# Altium PCB ComModule.pcbdoc
Units mm, origin at the board's own origin, x right, y up, seen from the top; angles counter-clockwise.
Board outline 25.4 x 31.2 mm, 2 copper layers (Top Layer, Bottom Layer); 26 components, 20 nets, 141 pads, 54 vias.
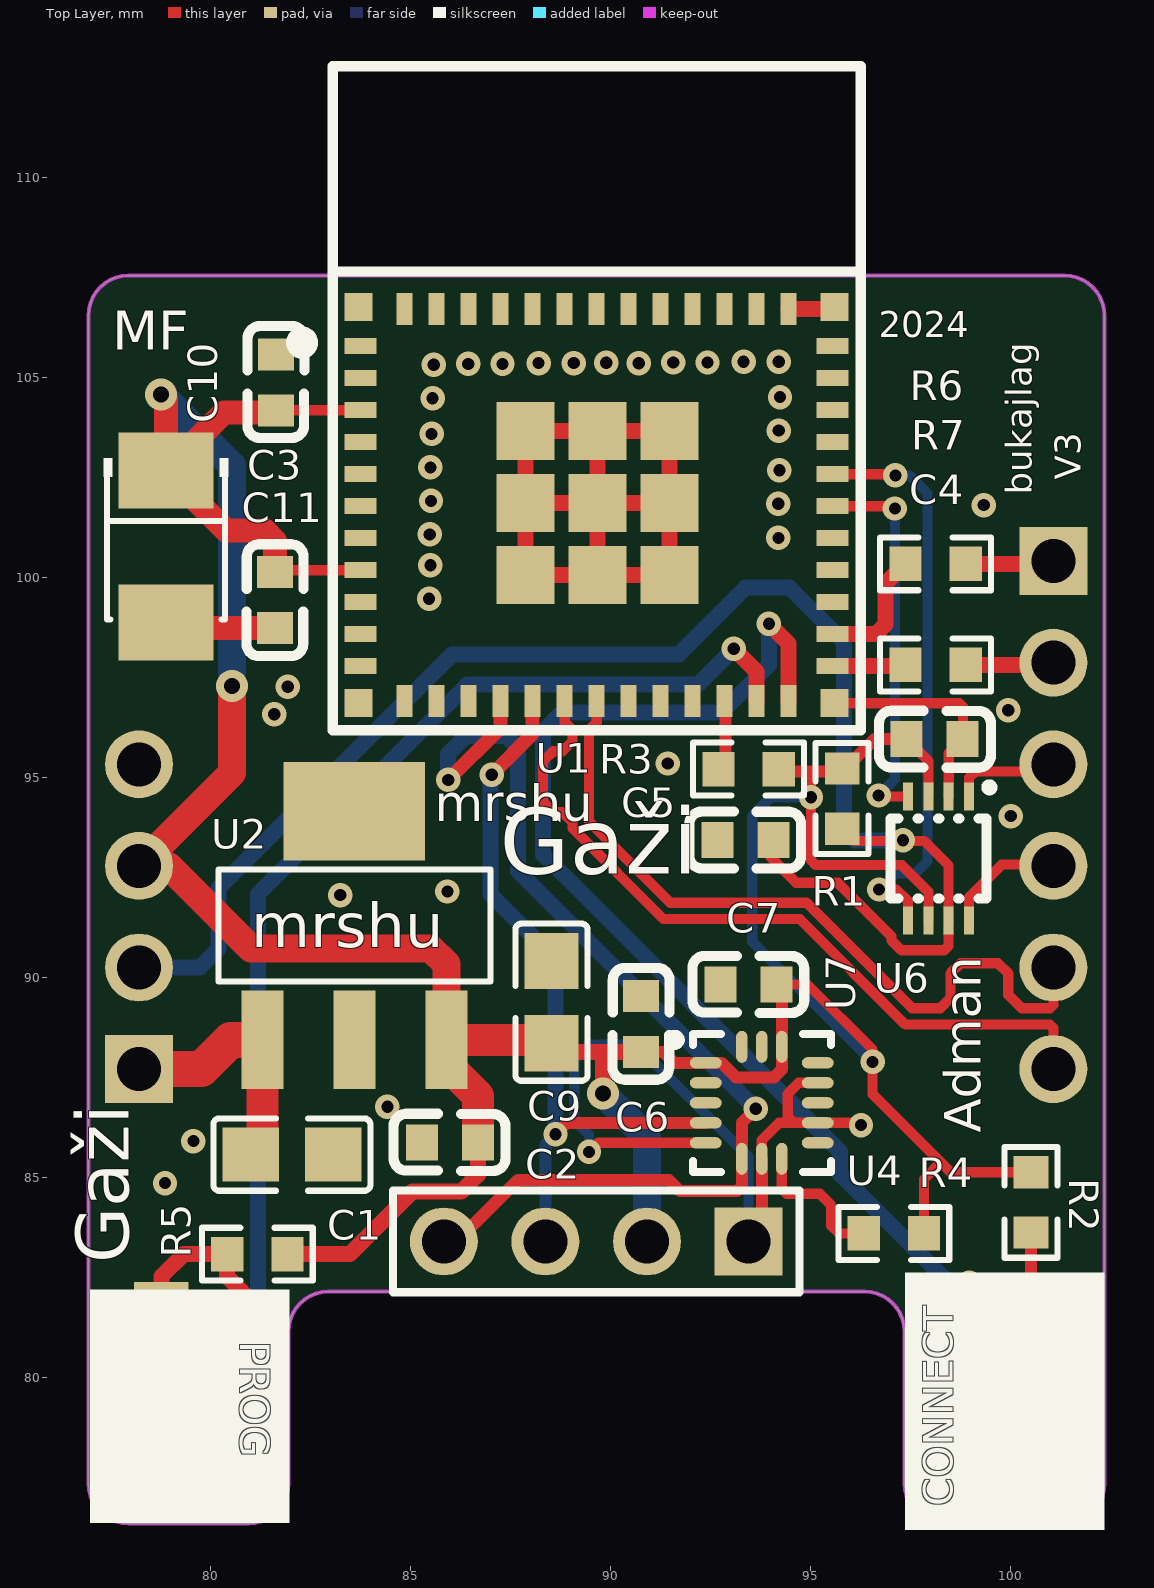
[diagram p0: Top Layer view]
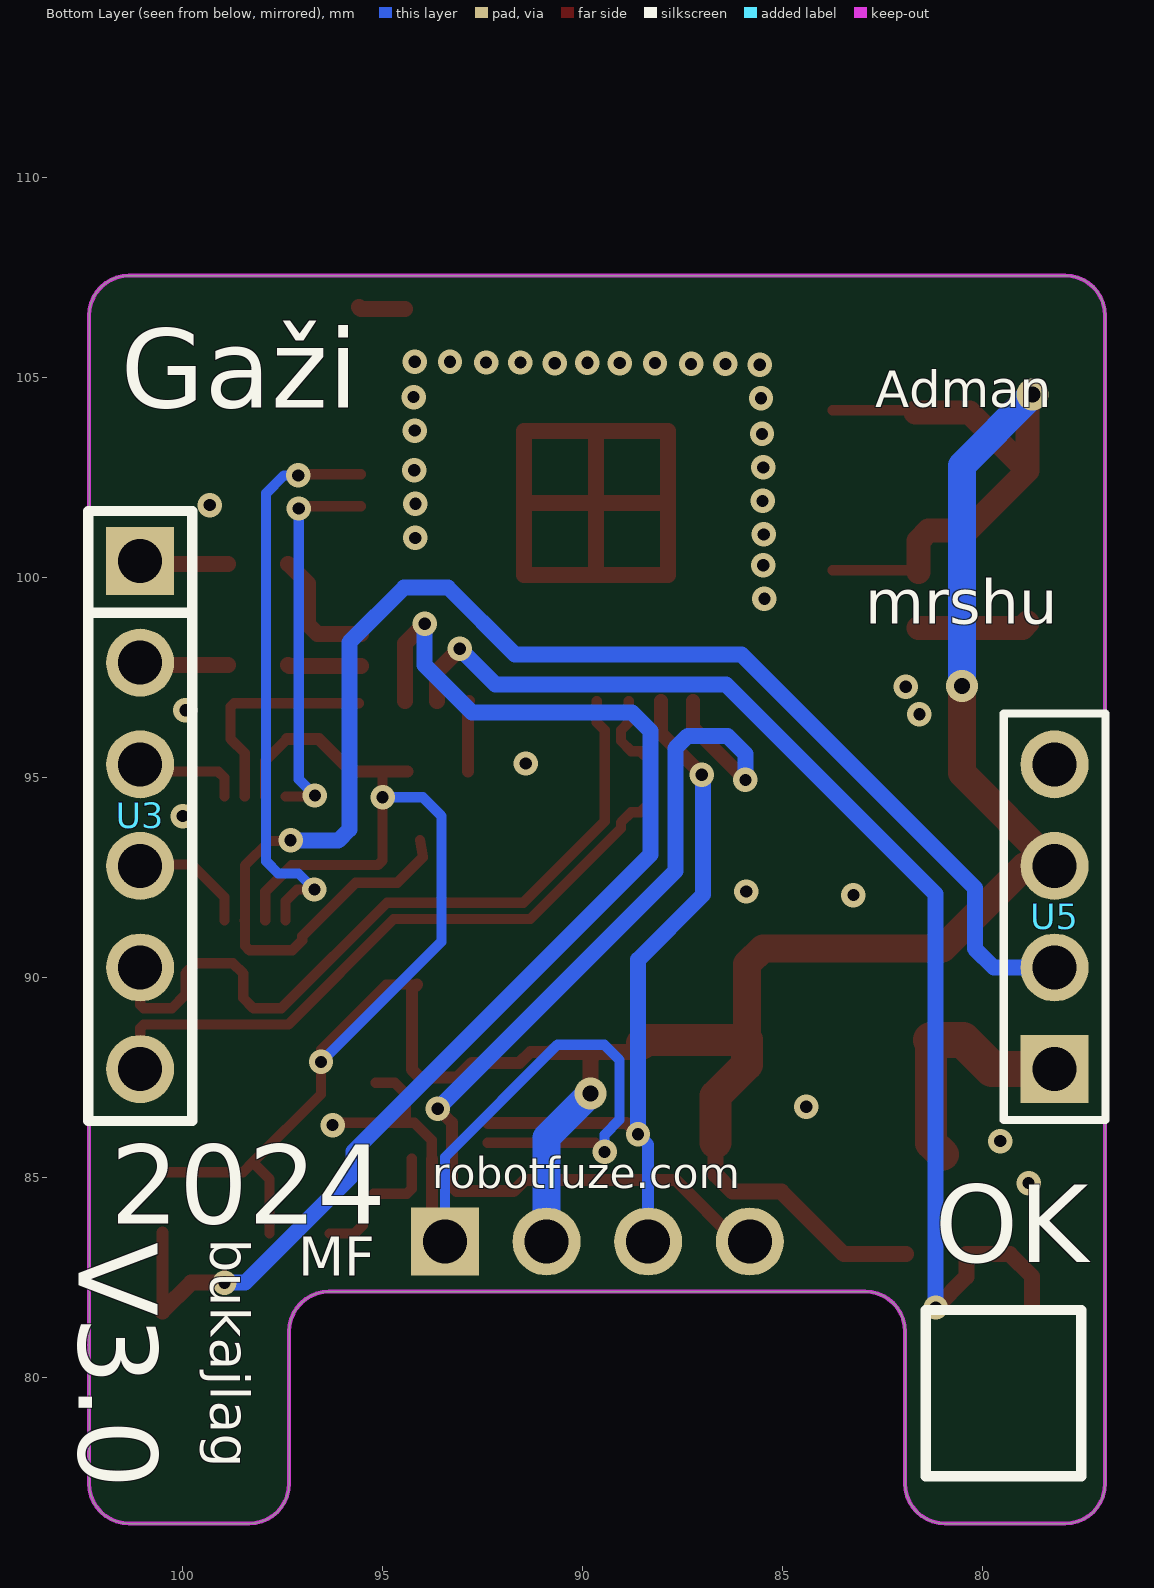
[diagram p1: Bottom Layer view, seen from below]

## Layer stack, top to bottom
Top Solder Mask Layer: solder mask 0.0102, Solder Resist, Dk 3.5
Top Layer: signal copper 0.0356
Dielectric1: dielectric 0.32, FR-4, Dk 4.8
Bottom Layer: signal copper 0.0356
Bottom Solder Mask Layer: solder mask 0.0102, Solder Resist, Dk 3.5

## Board outline
77.937,76.36 80.937,76.36 ccw(c80.937,77.36) 81.937,77.36 81.937,81.16 cw(c82.937,81.16) 82.937,82.16 96.337,82.16 cw(c96.337,81.16) 97.337,81.16 97.337,77.36 ccw(c98.337,77.36) 98.337,76.36 101.337,76.36 ccw(c101.337,77.36) 102.337,77.36 102.337,106.56 ccw(c101.337,106.56) 101.337,107.56 77.937,107.56 ccw(c77.937,106.56) 76.937,106.56 76.937,77.36 ccw(c77.937,77.36)

## Design rules (kind name [scope] priority, off if disabled: settings)
Clearance [All] p1: gap=0.254 ignorepadtopadclearanceinfootprint=FALSE except(0: Arc-Hole Track-Hole SMDPad-Hole THPad-Hole Via-Hole Fill-Hole Poly-Hole Region-Hole Text-Hole)
PolygonConnect [All] p1: connectstyle=Relief reliefconductorwidth=0.254 reliefentries=4 polygonreliefangle="90 Angle" airgapwidth=0.254
RoutingVias [All] p1: holewidth=0.711 width=1.27 viastyle="Through Hole" minholewidth=0.711 minwidth=1.27 maxholewidth=0.711 maxwidth=1.27
SolderMaskExpansion [All] p1: expansion=0.102 istentingtop=FALSE
Width [All] p1: maxlimit=0.254 minlimit=0.254 preferedwidth=0.254
30 further rules are at their usual default settings.

## Components (designator, comment, footprint, x,y, rotation, side; value= is the part's Value field where it differs from the comment)
C1 "0805B334K500NT" C0805 82.023,85.583 r180 top
C2 "0603B104K500NT_C30926" C0603 85.972,85.888 r0 top
C3 "0603B104K500NT_C30926" C0603 81.62,104.892 r270 top
C4 "0603B104K500NT_C30926" C0603 98.091,95.971 r180 top
C5 "0603B104K500NT_C30926" C0603 93.364,93.444 r0 top
C6 "0603B104K500NT_C30926" C0603 90.748,88.847 r270 top
C7 "0603B104K500NT_C30926" C0603 93.44,89.837 r0 top
C9 "0805B334K500NT" C0805 88.512,89.393 r270 top
C10 "CA45-B-6.3V-100uF-K" CAP-SMD_L3.5-W2.8-R-RD 78.873,100.785 r90 top
C11 "0603B104K500NT_C30926" C0603 81.604,99.451 r90 top
CONNECT "TS-1088-AR02016" SW-SMD_L3.9-W3.0-P4.45 100.503,79.48 r90 top
PROG "TS-1088-AR02016" SW-SMD_L3.9-W3.0-P4.45 78.76,79.594 r90 top
R1 "0603WAF1002T5E" R0603 95.777,94.486 r90 top
R2 "0603WAF1002T5E" R0603 100.501,84.389 r90 top
R3 "0603WAF1002T5E" R0603 93.44,95.222 r0 top
R4 "0603WAF1002T5E" R0603 97.072,83.614 r0 top
R5 "0603WAF1002T5E" R0603 81.159,83.094 r0 top
R6 "0603WAJ0102T5E" R0603 98.114,100.353 r180 top
R7 "0603WAJ0102T5E" R0603 98.114,97.826 r180 top
U1 "ESP32-C6-MINI-1-N4" WIFIM-SMD_61P-L16.6-W13.2-P0.80-ESP32-C6-MINI-1-N4 89.644,101.819 r0 top
U2 "UA78M33CDCYR" SOT-223_L6.5-W3.5-P2.30-LS7.0-BR 83.585,91.311 r270 top
U3 "2541WV-06P" HDR-TH_6P-P2.54-V-M 101.06,94.072 r270 bottom
U4 "2541WV-04P" HDR-TH_4P-P2.54-V-M-1 89.63,83.412 r180 top
U5 "2541WV-04P" HDR-TH_4P-P2.54-V-M-1 78.2,91.532 r90 bottom
U6 "TXS0102DCUR" VSON8_L2.0-W2.3-P0.50-LS3.1-BL 98.19,92.987 r180 top
U7 "LIS3DHTR" LGA-16_L3.0-W3.0-P0.50-TL 93.77,86.878 r0 top

## Footprints (in the part's own frame and the unit in brackets; to place one, negate y for a bottom-side part, rotate by r counter-clockwise, add the part's x,y. Pads: shape width x height; smd on the part's side, far side on the other; paste and mask are expansions set on the pad)
C0603 [mm]
  rect 0.8x0.9 smd paste+0 mask+0.051: 1(-0.7,0) 2(0.7,0)
  silkscreen extent -1.41,-0.71 1.39,0.72
C0805 [mm]
  rect 1.41x1.35 smd paste-100 mask+0.051: 1(-1.03,0) 2(1.03,0)
  silkscreen extent -1.96,-0.9 1.96,0.9
CAP-SMD_L3.5-W2.8-R-RD [mm]
  rect 1.9x2.376 smd paste+0 mask+0.051: 1(1.899,0) 2(-1.899,0)
  silkscreen extent -1.83,-1.55 2.21,1.55
HDR-TH_4P-P2.54-V-M-1 [mm]
  rect 1.7x1.7 hole 1.1 paste+0 mask+0.051: 1(-3.81,0)
  round 1.7 hole 1.1 paste+0 mask+0.051: 2(-1.27,0) 3(1.27,0) 4(3.81,0)
  silkscreen extent -5.08,-1.27 5.08,1.27
HDR-TH_6P-P2.54-V-M [mm]
  rect 1.7x1.7 hole 1.1 paste+0 mask+0.051: 1(-6.35,0)
  round 1.7 hole 1.1 paste+0 mask+0.051: 2(-3.81,0) 3(-1.27,0) 4(1.27,0) 5(3.81,0) 6(6.35,0)
  silkscreen extent -7.6,-1.3 7.65,1.3
LGA-16_L3.0-W3.0-P0.50-TL [mm]
  oval 0.8x0.28 smd paste+0 mask+0.051: 1(-1.4,1) 2(-1.4,0.5) 3(-1.4,0) 4(-1.4,-0.5) 5(-1.4,-1) 9(1.4,-1) 10(1.4,-0.5) 11(1.4,0) 12(1.4,0.5) 13(1.4,1)
  oval 0.28x0.8 smd paste+0 mask+0.051: 6(-0.5,-1.4) 7(0,-1.4) 8(0.5,-1.4) 14(0.5,1.4) 15(0,1.4) 16(-0.5,1.4)
  silkscreen extent -2.3,-1.72 1.73,1.73
R0603 [mm]
  rect 0.806x0.864 smd paste-100 mask+0.051: 1(-0.753,0) 2(0.753,0)
  silkscreen extent -1.39,-0.66 1.39,0.66
SOT-223_L6.5-W3.5-P2.30-LS7.0-BR [mm]
  rect 2.465x1.05 smd paste+0 mask+0.051: 1(2.858,-2.3) 2(2.857,0) 3(2.857,2.3)
  rect 2.465x3.54 smd paste+0 mask+0.051: 4(-2.857,0)
  silkscreen extent -1.4,-3.4 1.4,3.4
SW-SMD_L3.9-W3.0-P4.45 [mm]
  rect 1.23x1.36 smd: 1(-2.185,0) 2(2.185,0)
  silkscreen extent -2.03,-1.62 2.25,1.62
VSON8_L2.0-W2.3-P0.50-LS3.1-BL [mm]
  rect 0.25x0.7 smd paste+0 mask+0.051: 1(-0.762,-1.55) 2(-0.254,-1.55) 3(0.254,-1.55) 4(0.762,-1.55) 5(0.762,1.55) 6(0.254,1.55) 7(-0.254,1.55) 8(-0.762,1.55)
  silkscreen extent -1.37,-1.88 1.2,1
WIFIM-SMD_61P-L16.6-W13.2-P0.80-ESP32-C6-MINI-1-N4 [mm]
  rect 0.8x0.4 smd paste+0 mask+0.05: 1(-5.9,3.975) 2(-5.9,3.175) 3(-5.9,2.375) 4(-5.9,1.575) 5(-5.9,0.775) 6(-5.9,-0.025) 7(-5.9,-0.825) 8(-5.9,-1.625) 9(-5.9,-2.425) 10(-5.9,-3.225) 11(-5.9,-4.025) 25(5.9,-4.025) 26(5.9,-3.225) 27(5.9,-2.425) 28(5.9,-1.625) 29(5.9,-0.825) 30(5.9,-0.025) 31(5.9,0.775) 32(5.9,1.575) 33(5.9,2.375) 34(5.9,3.175) 35(5.9,3.975)
  rect 0.4x0.8 smd paste+0 mask+0.05: 12(-4.8,-4.9) 13(-4,-4.9) 14(-3.2,-4.9) 15(-2.4,-4.9) 16(-1.6,-4.9) 17(-0.8,-4.9) 18(0,-4.9) 19(0.8,-4.9) 20(1.6,-4.9) 21(2.4,-4.9) 22(3.2,-4.9) 23(4,-4.9) 24(4.8,-4.9) 36(4.8,4.9) 37(4,4.9) 38(3.2,4.9) 39(2.4,4.9) 40(1.6,4.9) 41(0.8,4.9) 42(0,4.9) 43(-0.8,4.9) 44(-1.6,4.9) 45(-2.4,4.9) 46(-3.2,4.9) 47(-4,4.9) 48(-4.8,4.9)
  rect 1.45x1.45 smd paste+0 mask+0.05: 49(-1.775,-1.75) 49(-1.775,0.05) 49(-1.775,1.85) 49(0.025,-1.75) 49(0.025,0.05) 49(0.025,1.85) 49(1.825,-1.75) 49(1.825,0.05) 49(1.825,1.85)
  rect 0.7x0.7 smd paste+0 mask+0.05: 50(5.95,4.95) 51(5.95,-4.95) 52(-5.95,-4.95) 53(-5.95,4.95)
  silkscreen extent -7.57,-5.62 6.6,10.98

## Via types
v1: diameter 0.61, hole 0.305, Top Layer to Bottom Layer, 51 vias
v2: diameter 0.8, hole 0.4, Top Layer to Bottom Layer, 3 vias

## Nets (pads, with @x,y where several pads share a name; then routed paths per layer and width w, separated by ;. In a path a pad name is that pad's centre, name@x,y a point inside that pad or via, vN(x,y) a via of type N, cw(c..) or ccw(c..) an arc to the next point about the centre after c; other vN are vias at no path point)
3.3V: C2.2 C3.2 C4.2 C6.2 C7.2 C9.2 C10.1 C11.2 R1.2 R2.2 R3.2 R4.2 R5.2 U1.3 U1.8 U2.3 U4.2 U5.3 U6.3 U6.6 U7.1 U7.14 | length 94.7
  Top Layer w0.254: C11.2 81.646,100.194 U1.8 ; C3.2@81.68,104.139 81.735,104.194 U1.3
  Top Layer w0.256: C7.2 94.913,89.837 96.54,88.211 v1(96.54,87.902) 96.54,87.093 98.244,85.389 ; 95.034,95.159 95,95.125 v1(95,94.515) 95,92.942 95.12,92.822 97.27,92.822 97.936,92.156 U6.6 ; C4.2 97.936,95.427 U6.3 ; R4.2 97.826,84.97 98.244,85.389 ; R2.2 98.491,85.142 98.244,85.389
  Top Layer w0.3: C6.2 91.308,88.147 91.576,87.878 U7.1 92.763,87.878 93.13,87.512 94.07,87.512 94.27,87.712 U7.14 94.27,89.707 C7.2 ; R3.2@94.371,95.159 95.034,95.159 95.777,95.159 96.59,95.971 C4.2
  Top Layer w0.4: R5.2 83.471,83.094 85.033,84.656 86.252,84.656 86.672,85.076 C2.2 ; C9.2 88.729,88.147 89.67,88.147 ; v2(89.8,87.112) 89.8,88.017 89.67,88.147 ; C6.2 89.67,88.147
  Top Layer w0.6: v2(78.75,104.582) 78.873,104.459 C10.1 ; C11.2 81.604,100.928 81.35,101.182 80.375,101.182 C10.1 ; C3.2@81.68,104.139 80.329,104.139 C10.1
  Top Layer w0.7: v2(80.52,97.302) 80.52,95.122 U5.3 78.94,92.802 81,90.742 85.49,90.742 85.885,90.347 U2.3
  Top Layer w0.8: C2.2 86.672,87.055 85.885,87.842 U2.3 88.422,88.453 C9.2
  Bottom Layer w0.256: v1(95,94.515) 93.994,94.515 93.53,94.052 93.53,90.902 v1@96.53,87.902
  Bottom Layer w0.7: v2(78.75,104.582) 80.52,102.812 v2(80.52,97.302) ; v2(89.8,87.112) 90.9,86.012 U4.2
$1N2460: R3.1 U1.22 | length 1.8
  Top Layer w0.3: U1.22 92.864,96.899 R3.1@92.864,95.159
$1N2771: R4.1 U7.8 | length 3.6
  Top Layer w0.256: U7.8 94.27,84.727 94.393,84.605 95.218,84.605 95.497,84.326 95.497,83.818 95.701,83.614 R4.1
$1N3900: R7.2 U1.25 | length 1.8
  Top Layer w0.4: U1.25 97.329,97.794 R7.2
$1N4216: R6.2 U1.26 | length 3.1
  Top Layer w0.4: U1.26 96.621,98.594 96.869,98.842 96.869,99.862 R6.2
BUT_1: CONNECT.2 R2.1 U1.24 | length 31.8
  Top Layer w0.3: CONNECT.2 R2.1@100.503,83.634
  Top Layer w0.4: v1(93.948,98.854) 94.444,98.358 U1.24 ; v1(98.952,82.382) 99.785,82.382 CONNECT.2
  Bottom Layer w0.4: v1(93.948,98.854) 93.948,97.82 92.77,96.642 88.77,96.642 88.3,96.172 88.3,93.087 95.73,85.657 95.73,85.092 98.439,82.382 v1(98.952,82.382)
BUT_2: PROG.2 R5.1 U1.23 | length 30.6
  Top Layer w0.4: PROG.2 78.76,82.536 79.318,83.094 R5.1 80.406,82.526 v1(81.172,81.76) ; v1(93.072,98.232) 93.644,97.66 U1.23
  Bottom Layer w0.4: v1(81.172,81.76) 81.172,92.093 86.41,97.332 92.171,97.332 v1(93.072,98.232)
GND: C1.1 C2.1 C3.1 C4.1 C5.1 C6.1 C7.1 C9.1 C10.2 C11.1 CONNECT.1 PROG.1 U1.1 U1.2 U1.11 U1.14 U1.36 U1.37 U1.38 U1.39 U1.40 U1.41 U1.42 U1.43 U1.44 U1.45 U1.46 U1.47 U1.48 U1.49 U1.50 U1.51 U1.52 U1.53 U2.2 U2.4 U4.1 U5.4 U6.2 U7.5 U7.7 U7.10 U7.12 | length 51.5
  Top Layer w0.256: v1(89.45,85.652) 89.677,85.878 U7.5 ; U7.7 93.77,85.942 94.207,86.378 94.573,86.378 ; U7.12 94.697,87.378 94.42,87.102 94.42,86.532 94.573,86.378 ; U1.51 98.712,96.869 98.8,96.782 98.8,95.98 C4.1 98.444,95.624 U6.2 ; v1(96.25,86.322) 96.193,86.378 U7.10 94.573,86.378
  Top Layer w0.3: U4.1 93.77,83.742 U7.7
  Top Layer w0.4: U1.36 95.544,106.719 U1.50 ; U1.49@87.869,101.869 U1.49@89.669,101.869 ; U1.49@87.869,101.869 87.869,100.069 U1.49@89.669,100.069 ; U1.49@87.869,101.869 87.869,103.669 U1.49@89.669,103.669 ; U1.49@89.669,100.069 U1.49@89.669,101.869 ; U1.49@89.669,100.069 91.469,100.069 U1.49@91.469,101.869 ; U1.49@89.669,101.869 U1.49@91.469,101.869 ; U1.49@89.669,101.869 U1.49@89.669,103.669 ; U1.49@89.669,103.669 91.469,103.669 U1.49@91.469,101.869
  Top Layer w0.6: C10.2 79.008,98.751 C11.1
  Bottom Layer w0.256: v1(89.45,85.652) 89.45,86.085 89.08,86.455 89.08,87.952 89.46,88.332 90.63,88.332 93.44,85.522 U4.1
  other v1: 78.85,84.872 79.56,85.922 84.41,86.782 83.23,92.072 85.91,92.162 99.995,94.047 91.42,95.362 81.58,96.592 99.93,96.692 81.92,97.282 85.454,99.482 85.485,100.32 94.185,101 85.469,101.088 99.32,101.822 94.179,101.856 85.5,101.925 94.21,102.693 85.485,102.763 85.515,103.6 94.195,103.683 85.539,104.494 94.225,104.52 85.57,105.332 86.43,105.352 87.287,105.352 88.19,105.372 89.07,105.372 90.695,105.367 89.88,105.382 91.555,105.387 92.412,105.387 93.315,105.407 94.195,105.407
LOGV: C5.2 R1.1 U5.2 U6.7 | length 40.3
  Top Layer w0.25: R1.1 96.087,93.422 97.83,93.422 98.444,92.808 U6.7
  Top Layer w0.256: C5.2 93.992,93.02 94.63,92.382 95.672,92.382 97.01,91.044 97.01,90.942 97.26,90.692 98.33,90.692 98.44,90.802 98.44,91.433 U6.7
  Bottom Layer w0.4: U5.2 79.72,90.262 80.19,90.732 80.19,92.252 86.03,98.092 91.695,98.092 93.365,99.762 94.46,99.762 95.83,98.392 95.83,93.712 96.11,93.432 97.29,93.432 v1(97.3,93.442)
OUT_1: R6.1 U3.1 | length 1.9
  Top Layer w0.4: R6.1 100.603,100.353 U3.1@100.704,100.455
OUT_2: R7.1 U3.2 | length 1.9
  Top Layer w0.4: R7.1 100.616,97.826 U3.2@100.704,97.915
RX_ESP: U1.30 U6.4 | length 9.7
  Top Layer w0.256: U1.30 97.041,101.794 v1(97.098,101.737) ; v1(96.691,94.562) 96.716,94.537 U6.4
  Bottom Layer w0.256: v1(96.691,94.562) 97.098,94.968 v1(97.098,101.737)
RX_OUT: U3.3 U6.1 | length 2.4
  Top Layer w0.256: U6.1 98.952,95.006 99.104,95.159 100.489,95.159 U3.3@100.704,95.375
SCL: U1.16 U4.3 U7.4 | length 18.6
  Top Layer w0.3: v1(88.614,86.091) 88.901,86.378 U7.4
  Top Layer w0.35: v1(87.02,95.082) 88.044,96.106 U1.16
  Bottom Layer w0.3: U4.3 88.36,85.837 v1(88.614,86.091)
  Bottom Layer w0.4: v1(87.02,95.082) 86.99,95.052 86.99,92.082 88.614,90.458 v1(88.614,86.091)
SDA: U1.15 U4.4 U7.6 | length 27
  Top Layer w0.3: U4.4 86.138,83.412 87.674,84.948 91.446,84.948 91.726,84.668 93.148,84.668 93.27,84.791 U7.6 93.27,86.382 v1(93.62,86.732)
  Top Layer w0.35: v1(85.93,94.952) 87.244,96.266 U1.15
  Bottom Layer w0.4: v1(85.93,94.952) 85.93,95.602 86.38,96.052 87.37,96.052 87.68,95.742 87.68,92.672 v1(93.62,86.732)
TX_ESP: U1.31 U6.5 | length 14.6
  Top Layer w0.256: U1.31 97.079,102.594 v1(97.11,102.563) ; v1(96.704,92.212) 97.136,92.212 97.428,91.92 U6.5
  Bottom Layer w0.256: v1(96.704,92.212) 97.103,92.612 97.61,92.612 97.912,92.914 97.912,102.116 97.466,102.563 v1(97.11,102.563)
TX_OUT: U3.4 U6.8 | length 2.7
  Top Layer w0.256: U6.8 98.952,92.022 99.765,92.835 U3.4@100.704,92.835
USB_D+: U1.18 U3.5 | length 19.2
  Top Layer w0.256: U1.18 89.644,96.391 89.448,96.196 89.448,93.914 91.48,91.882 94.89,91.882 97.53,89.242 98.23,89.242 98.486,89.498 98.486,90.113 98.742,90.369 99.674,90.369 99.93,90.113 99.93,89.578 100.266,89.242 100.969,89.242 101.06,89.332 U3.5
USB_D-: U1.17 U3.6 | length 19.2
  Top Layer w0.256: U1.17 88.844,96.391 89.04,96.196 89.04,95.924 88.784,95.668 88.556,95.668 88.3,95.412 88.3,94.4 88.556,94.144 88.784,94.144 89.04,93.888 89.04,93.744 91.311,91.473 94.721,91.473 97.361,88.833 100.969,88.833 101.06,88.743 U3.6
VIN: C1.2 U2.1 U5.1 | length 6.4
  Top Layer w0.8: C1.2 81.285,85.875 U2.1
  Top Layer w0.9: U5.1 79.76,87.722 80.491,88.453 U2.1
pads on no net: U1.4 U1.5 U1.6 U1.7 U1.9 U1.10 U1.12 U1.13 U1.19 U1.20 U1.21 U1.27 U1.28 U1.29 U1.32 U1.33 U1.34 U1.35 U7.2 U7.3 U7.9 U7.11 U7.13 U7.15 U7.16

## Keep-outs
Board Outline Layer:
  the board outline again, w0.1

## Silkscreen, mask and mechanical layers (free items; w line width, h text height)
Top Silkscreen Layer:
  region: 97.36,76.2 102.337,76.2 102.337,82.632 97.36,82.632 97.36,76.2
  region: 76.976,76.378 81.953,76.378 81.953,82.2 76.976,82.2 76.976,76.378
  text "2024" at 96.696,106.024 h0.65
  text "MF" at 77.53,105.705 h0.97
  text "V3" at 101.748,102.455 h0.65 r90
  text "bukajlag" at 100.518,102.084 h0.65 r90
  text "mrshu" at 85.593,93.922 h0.91
  text "Gaži" at 87.22,92.054 h2.83
  text "mrshu" at 81.009,90.769 h1.1
  text "Adman" at 99.239,86.124 h0.91 r90
  text "Gaži" at 78.382,82.87 h2.27 r90
Bottom Silkscreen Layer:
  lines w0.256: 77.535,77.542 81.42,77.542 81.42,81.697 77.535,81.697 77.535,77.542
  text "Adman" at 82.683,104.262 h0.91
  text "Gaži" at 101.542,103.609 h3.4
  text "mrshu" at 82.939,98.849 h1.1
  text "robotfuze.com" at 93.761,84.738 h0.78
  text "2024" at 101.814,83.858 h1.98
  text "bukajlag" at 99.293,83.479 h0.97 r90
  text "V3.0" at 102.597,83.387 h1.98 r90
  text "OK" at 81.199,82.898 h1.95
  text "MF" at 97.11,82.555 h0.97